# Altium PCB PCB1.PcbDoc
Units mil, origin at the board's own origin, x right, y up, seen from the top; angles counter-clockwise.
Board outline 1466.5 x 2682.5 mil, 2 copper layers (Top Layer, Bottom Layer); 11 components, 9 nets, 65 pads, 0 vias.
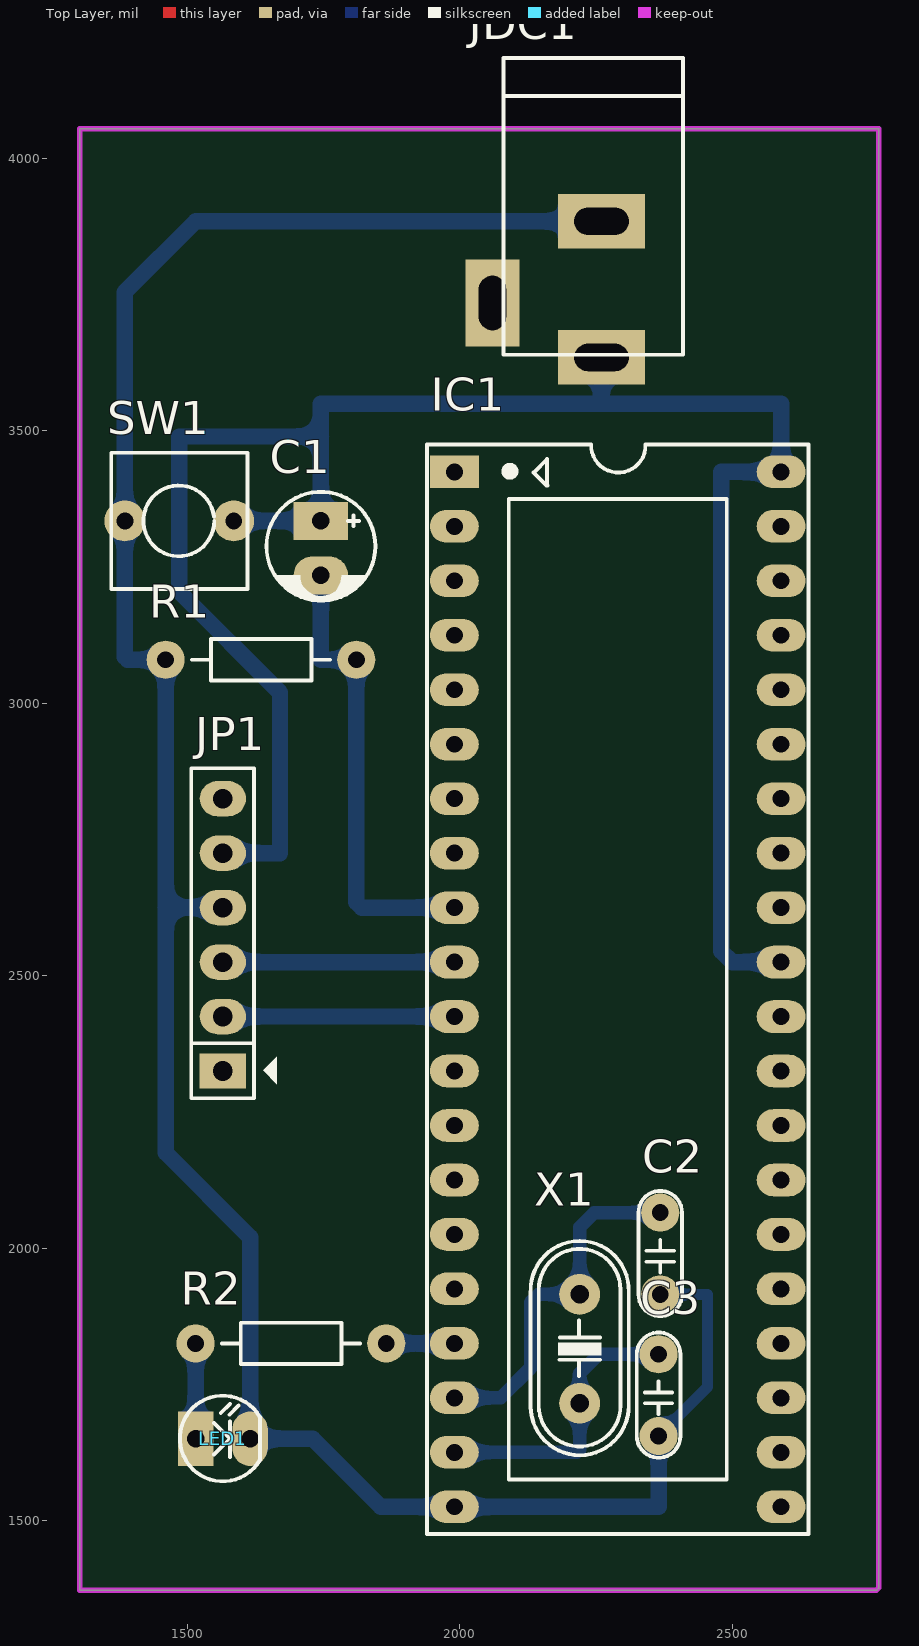
[diagram p0: Top Layer view]
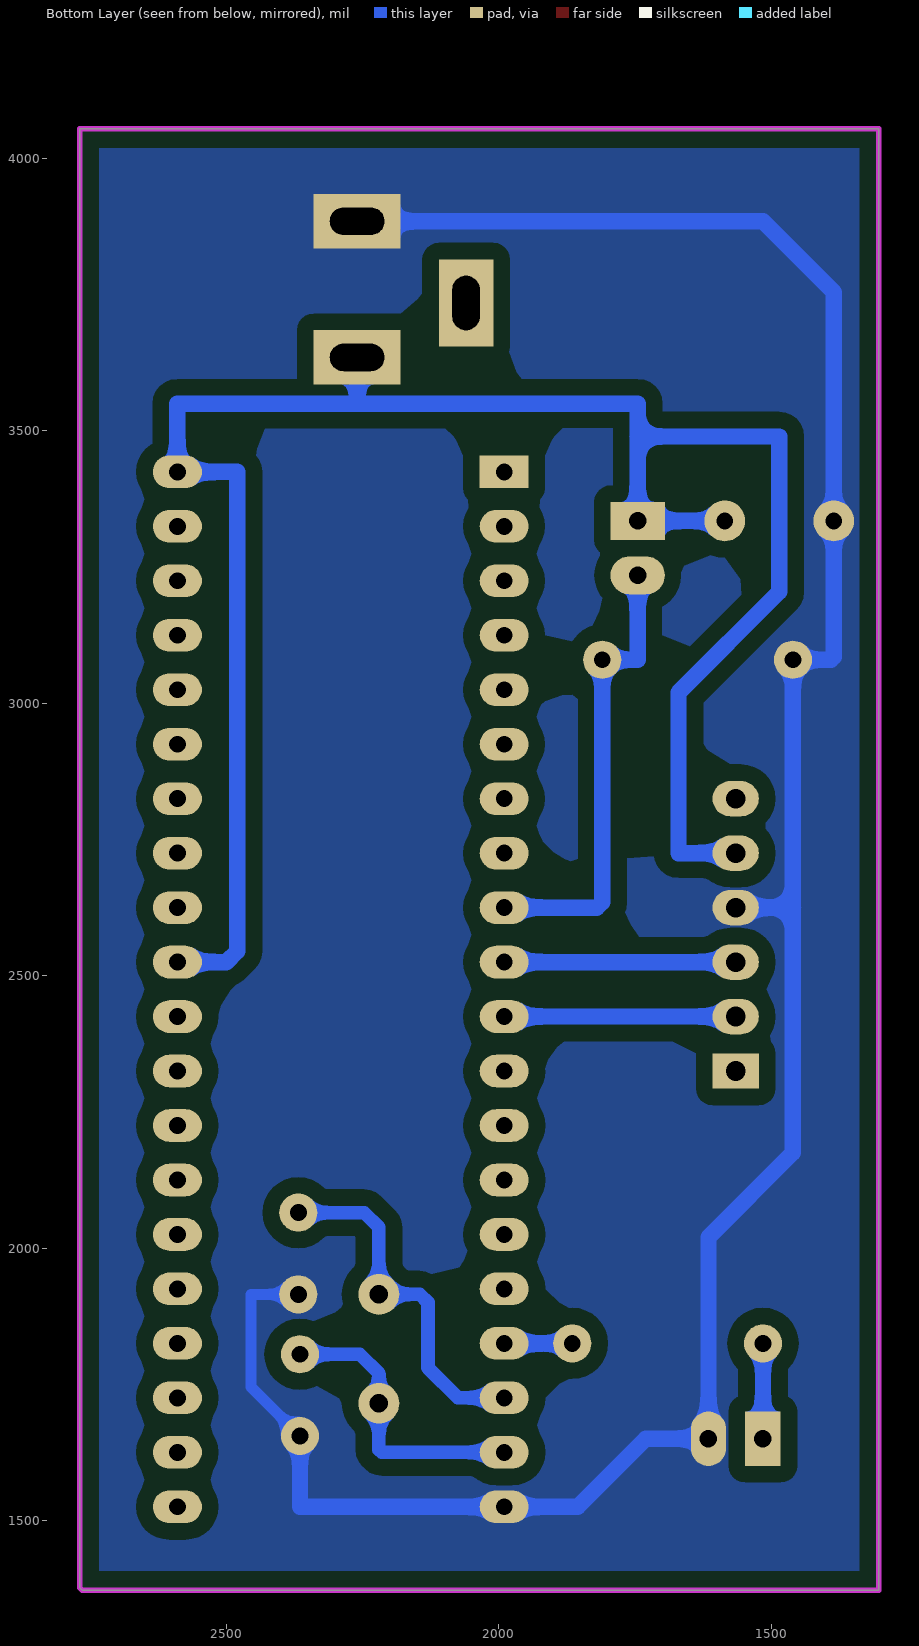
[diagram p1: Bottom Layer view, seen from below]
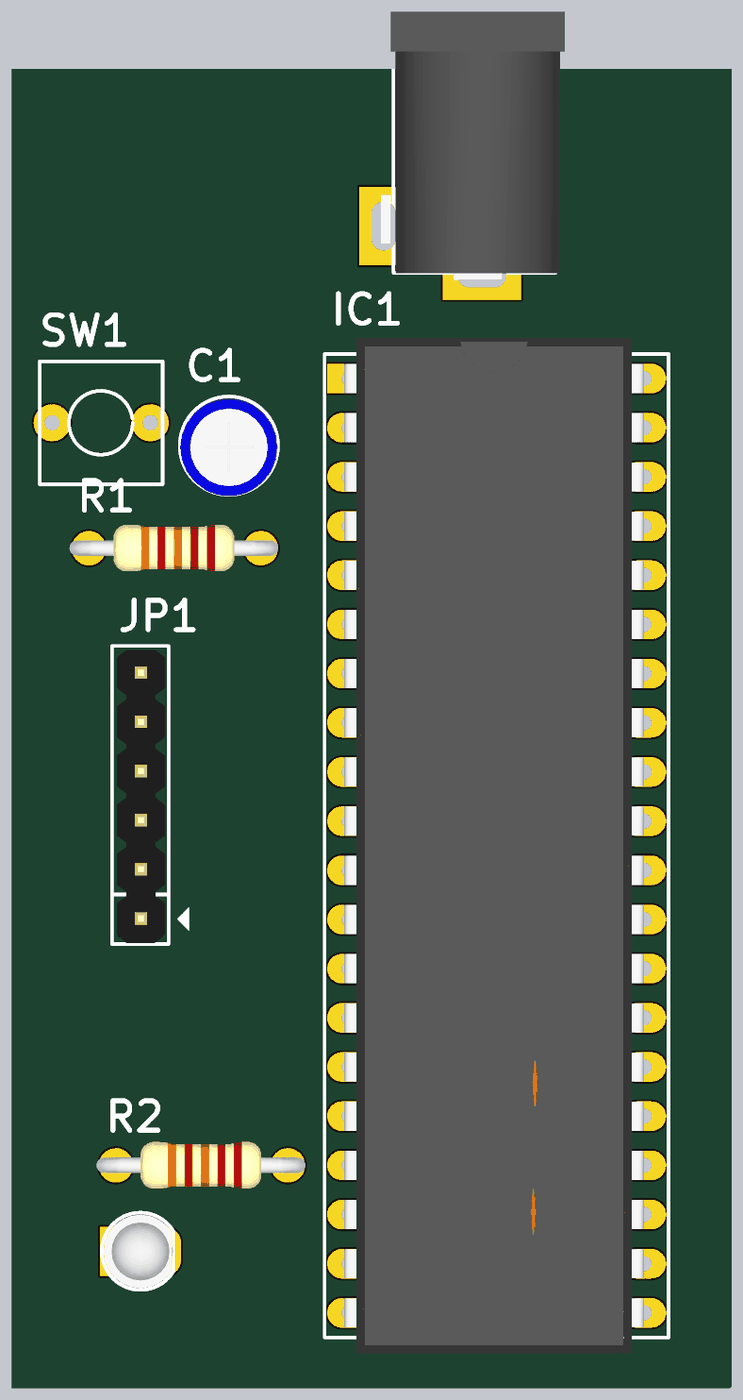
[diagram p2: 3D render of the assembled board from above, using the file's embedded part models]

## Layer stack, top to bottom
Top Solder: solder mask 0.4, Solder Resist, Dk 3.5
Top Layer: signal copper 1.4
Dielectric 1: dielectric 12.6, FR-4, Dk 4.8
Bottom Layer: signal copper 1.4
Bottom Solder: solder mask 0.4, Solder Resist, Dk 3.5

## Board outline
1302.5,1372 1302.5,4054.5 2769,4054.5 2769,1376 2765,1372

## Design rules (kind name [scope] priority, off if disabled: settings)
Clearance [All] p1: gap=30 ignorepadtopadclearanceinfootprint=FALSE
PlaneClearance [All] p1: clearance=30
PlaneConnect [All] p1: planeconnectstyle=Direct reliefexpansion=20 reliefentries=4 reliefconductorwidth=10 reliefairgap=10
PolygonConnect [All] p1: connectstyle=Direct reliefconductorwidth=10 reliefentries=4 polygonreliefangle="90 Angle" airgapwidth=10
RoutingLayers [All] p1: top layer_v5=FALSE bottom layer_v5=TRUE
RoutingVias [All] p1: holewidth=30 width=80 viastyle="Through Hole" minholewidth=30 minwidth=80 maxholewidth=30 maxwidth=80
SolderMaskExpansion [All] p1: expansion=4
Width [All] p1: maxlimit=30 minlimit=10 preferedwidth=30
27 further rules are at their usual default settings.

## Components (designator, comment, footprint, x,y, rotation, side; value= is the part's Value field where it differs from the comment)
C1 "10uF" CP1/2 1745,3335 r270 top value=10uF/50V
C2 "103" CN1.5 2367.99,1915 r90 top value=0.01uF
C3 "103" CN1.5 2365,1655 r90 top value=0.01uF
IC1 "AT89S52" DIP40/W0.6 1990,3425 r270 top
JDC1 "Jac DC" DC-IN 2160,3760 r270 top
JP1 "JP6 PIN" JP6 1565,2325 r90 top value=JP7
LED1 "LED" LED-3 1515,1650 r0 top value="LED 3 ly Single Colour"
R1 "1k" R1/4W 1460,3080 r0 top value="R1/4W - 1K"
R2 "1k" R1/4W 1515,1825 r0 top value="R1/4W - 1K"
SW1 "SW" SW2 1385,3335 r0 top value="SW chip 2 pin"
X1 "4Mhz" XT2 2220,1815 r270 top

## Footprints (in the part's own frame and the unit in brackets; to place one, negate y for a bottom-side part, rotate by r counter-clockwise, add the part's x,y. Pads: shape width x height; smd on the part's side, far side on the other; paste and mask are expansions set on the pad)
CN1.5 [mil]
  round 70 hole 31: 1(0,0) 2(150,0)
  silkscreen extent -40,-40 190,40, body extent -40,-33 190,33, height 235
CP1/2 [mil] "Tu hoa < 22uF/16>50V"
  rect 70x100 hole 32: 1(0,0)
  oval 70x100 hole 32: 2(100,0)
  silkscreen extent -53,-100 146,100, body extent -49,-99 149,99, height 287
DC-IN [mil] "Jac DC input"
  rect 100x160 hole 50 slot 100 at 90 deg: 1(125,100) 2(-125,100)
  rect 160x100 hole 50 slot 100 at 0 deg: 3(25,-100)
  silkscreen extent -425,-80 120,250, body extent -410,-105 134,269, height 434
DIP40/W0.6 [mil] "40 PIN, W 600mil, Pin to pin 100mil"
  rect 60x90 hole 31: 1(0,0)
  oval 60x90 hole 31: 2(100,0) 3(200,0) 4(300,0) 5(400,0) 6(500,0) 7(600,0) 8(700,0) 9(800,0) 10(900,0) 11(1000,0) 12(1100,0) 13(1200,0) 14(1300,0) 15(1400,0) 16(1500,0) 17(1600,0) 18(1700,0) 19(1800,0) 20(1900,0) 21(1900,600) 22(1800,600) 23(1700,600) 24(1600,600) 25(1500,600) 26(1400,600) 27(1300,600) 28(1200,600) 29(1100,600) 30(1000,600) 31(900,600) 32(800,600) 33(700,600) 34(600,600) 35(500,600) 36(400,600) 37(300,600) 38(200,600) 39(100,600) 40(0,600)
  silkscreen extent -50,-50 1950,650, body extent -82,-10 1982,600, height 224
JP6 [mil] "JP6"
  rect 65x85 hole 36: 1(0,0)
  oval 65x85 hole 36: 2(100,0) 3(200,0) 4(300,0) 5(400,0) 6(500,0)
  silkscreen extent -50,-99 556,58, body extent -48,-50 548,48, height 323
LED-3 [mil] "LED 2 PIN, 3ly Only colour"
  rect 65x100 hole 32: 1(0,0)
  oval 65x100 hole 32: 2(100,0)
  silkscreen extent -29,-78 118,79, body extent -25,-75 113,75, height 217
R1/4W [mil] "R 1/4W, 2 Pin, 350mil"
  round 70 hole 31: 1(0,0) 2(350,0)
  silkscreen extent 48,-38 302,38, body extent -40,-47 386,47, height 111
SW2 [mil] "SW button 2pin, 250x 250 mil"
  round 75 hole 31: 1(0,0) 2(200,0)
  silkscreen extent -25,-125 225,125
XT2 [mil] "Footpin for Crystal 2 pin"
  round 75 hole 34: 1(-100,0) 2(100,0)
  silkscreen extent -198,-90 195,90, body extent -233,-93 213,90, height 138

## Part data
C1: library part CP1, "Cap P  0,1uF < 22uF , 16 - 50V", Description 1="10 => 220uF/6,3V/10V - 10uF => 100uF/16V", Description 2="0,1uF => 33uF/50V - 10uF => 22uF/63V", Description 3="0,47uF => 10uF/100V"
C2 C3: library part CN1.5, "Cap np 682pF => 104pF"
IC1: "AT89S52, 8k Byte Flash Memory , 40 Pin"
JDC1: library part DCIN, "Jac DC input"
JP1: library part JP6
LED1: "LED Single colour Green and Red"
R1 R2: library part R1/4W, "Resistor 1/4W"
SW1: library part SW2, "Switch button 2 pin"
X1: library part XT2, "Crystal For all Crystal 2pin."

## Nets (pads, with @x,y where several pads share a name; then routed paths per layer and width w, separated by ;. In a path a pad name is that pad's centre, name@x,y a point inside that pad or via, vN(x,y) a via of type N, cw(c..) or ccw(c..) an arc to the next point about the centre after c; other vN are vias at no path point)
GND: C2.1 C3.1 IC1.20 JDC1.2 JP1.4 LED1.2 R1.1 SW1.1 | length 4591.2
  Bottom Layer w20: 1385,3085 1390,3080 ; C3.1 2455,1745 2455,1915 C2.1
  Bottom Layer w30: 1385,3085 SW1.1 1385,3755 1515,3885 JDC1.2 ; 1390,3080 R1.1 1460,2625 ; JP1.4 1460,2625 ; C3.1 2365,1525 IC1.20 1855,1525 1730,1650 LED1.2 1615,2020 1460,2175 1460,2625
NetC2_2: C2.2 IC1.18 X1.1 | length 661.2
  Bottom Layer w25: IC1.18 2075,1725 2130,1780 2130,1900 2145,1915 X1.1 2220,2037.99 2247.01,2065 C2.2
NetC3_2: C3.2 IC1.19 X1.2 | length 531.6
  Bottom Layer w20: 2215,1625 2220,1630
  Bottom Layer w25: IC1.19 2215,1625 ; 2220,1630 X1.2 2220,1770 2255,1805 C3.2
NetIC1_10: IC1.10 JP1.3 | length 425
  Bottom Layer w30: JP1.3 IC1.10
NetIC1_11: IC1.11 JP1.2 | length 425
  Bottom Layer w30: JP1.2 IC1.11
NetIC1_17: IC1.17 R2.2 | length 125
  Bottom Layer w30: R2.2 IC1.17
NetLED1_1: LED1.1 R2.1 | length 175
  Bottom Layer w30: LED1.1 R2.1
RS: C1.2 IC1.9 R1.2 | length 849.1
  Bottom Layer w30: C1.2 1745,3080 R1.2 1810,2635 1820,2625 IC1.9
VCC: C1.1 IC1.31 IC1.40 JDC1.1 JP1.5 SW1.2 | length 3747
  Bottom Layer w30: JP1.5 1670,2725 1670,3020 1485,3205 1485,3490 1745,3490 ; SW1.2 C1.1 1745,3490 ; JDC1.1 2260,3555 2255,3550 ; IC1.31 2500,2525 2480,2545 2480,3425 IC1.40 2590,3550 2255,3550 ; 1745,3490 1745,3550 2255,3550
pads on no net: IC1.1 IC1.2 IC1.3 IC1.4 IC1.5 IC1.6 IC1.7 IC1.8 IC1.12 IC1.13 IC1.14 IC1.15 IC1.16 IC1.21 IC1.22 IC1.23 IC1.24 IC1.25 IC1.26 IC1.27 IC1.28 IC1.29 IC1.30 IC1.32 IC1.33 IC1.34 IC1.35 IC1.36 IC1.37 IC1.38 IC1.39 JDC1.3 JP1.1 JP1.6

## Polygon pours and split planes (outlines as drawn)
GND on Bottom Layer "Bottom Layer-No Net" (solid, pour order 28): 2765,1372 1302.5,1372 1302.5,4054.5 2769,4054.5 2769,1376
GND on Bottom Layer "Bottom Layer-GND 1" (solid, pour order 16): 1768,3785
GND on Bottom Layer "Bottom Layer-GND" (solid, pour order 18): 3315,3395

## Keep-outs
Keep-Out Layer:
  the board outline again, w10